# Allegro board PerfecTea_rev_2-Template.brd
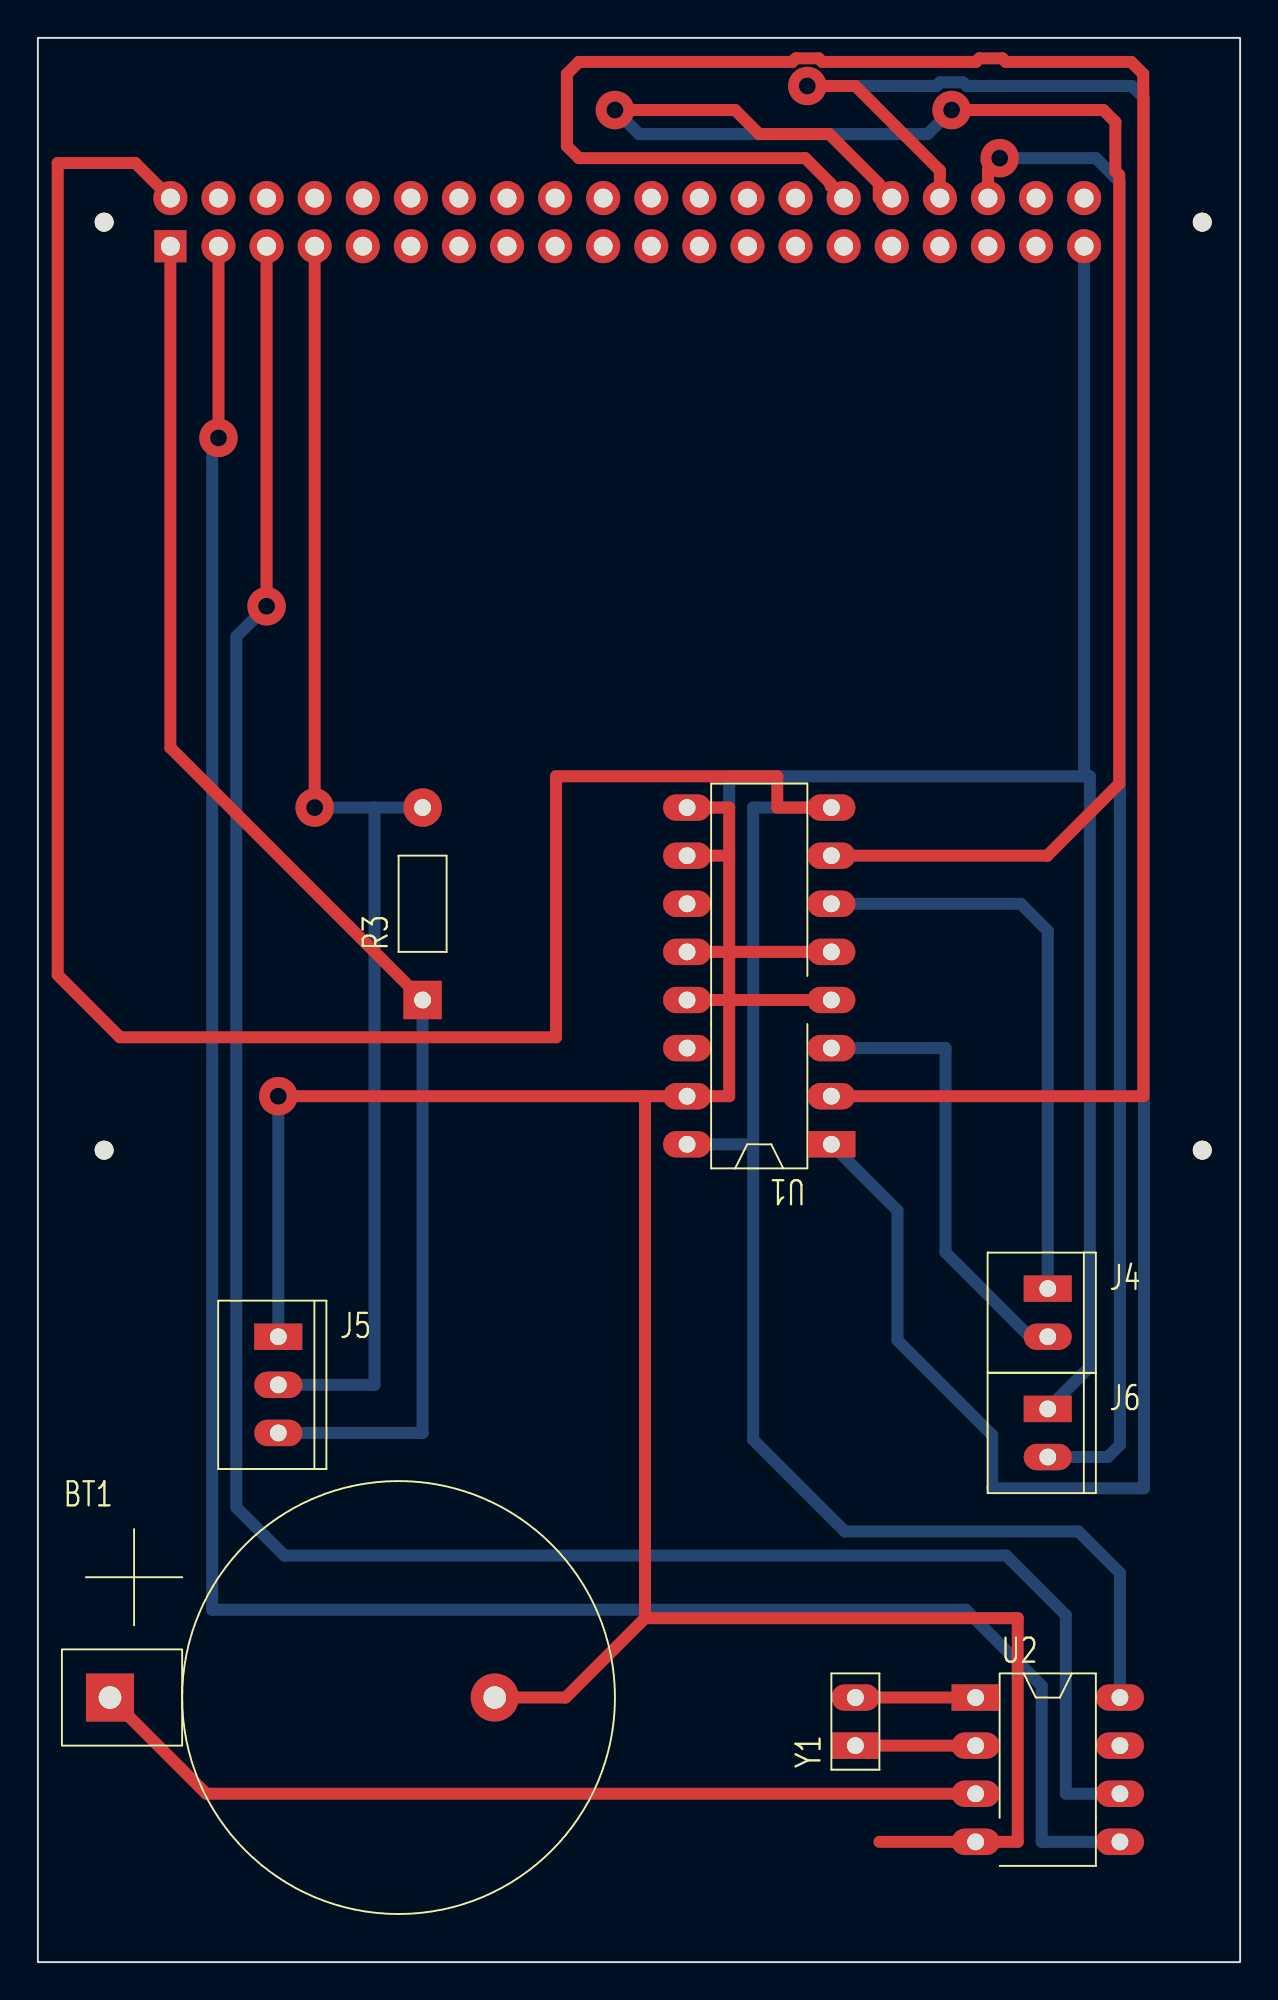
[diagram p0: board, top side]
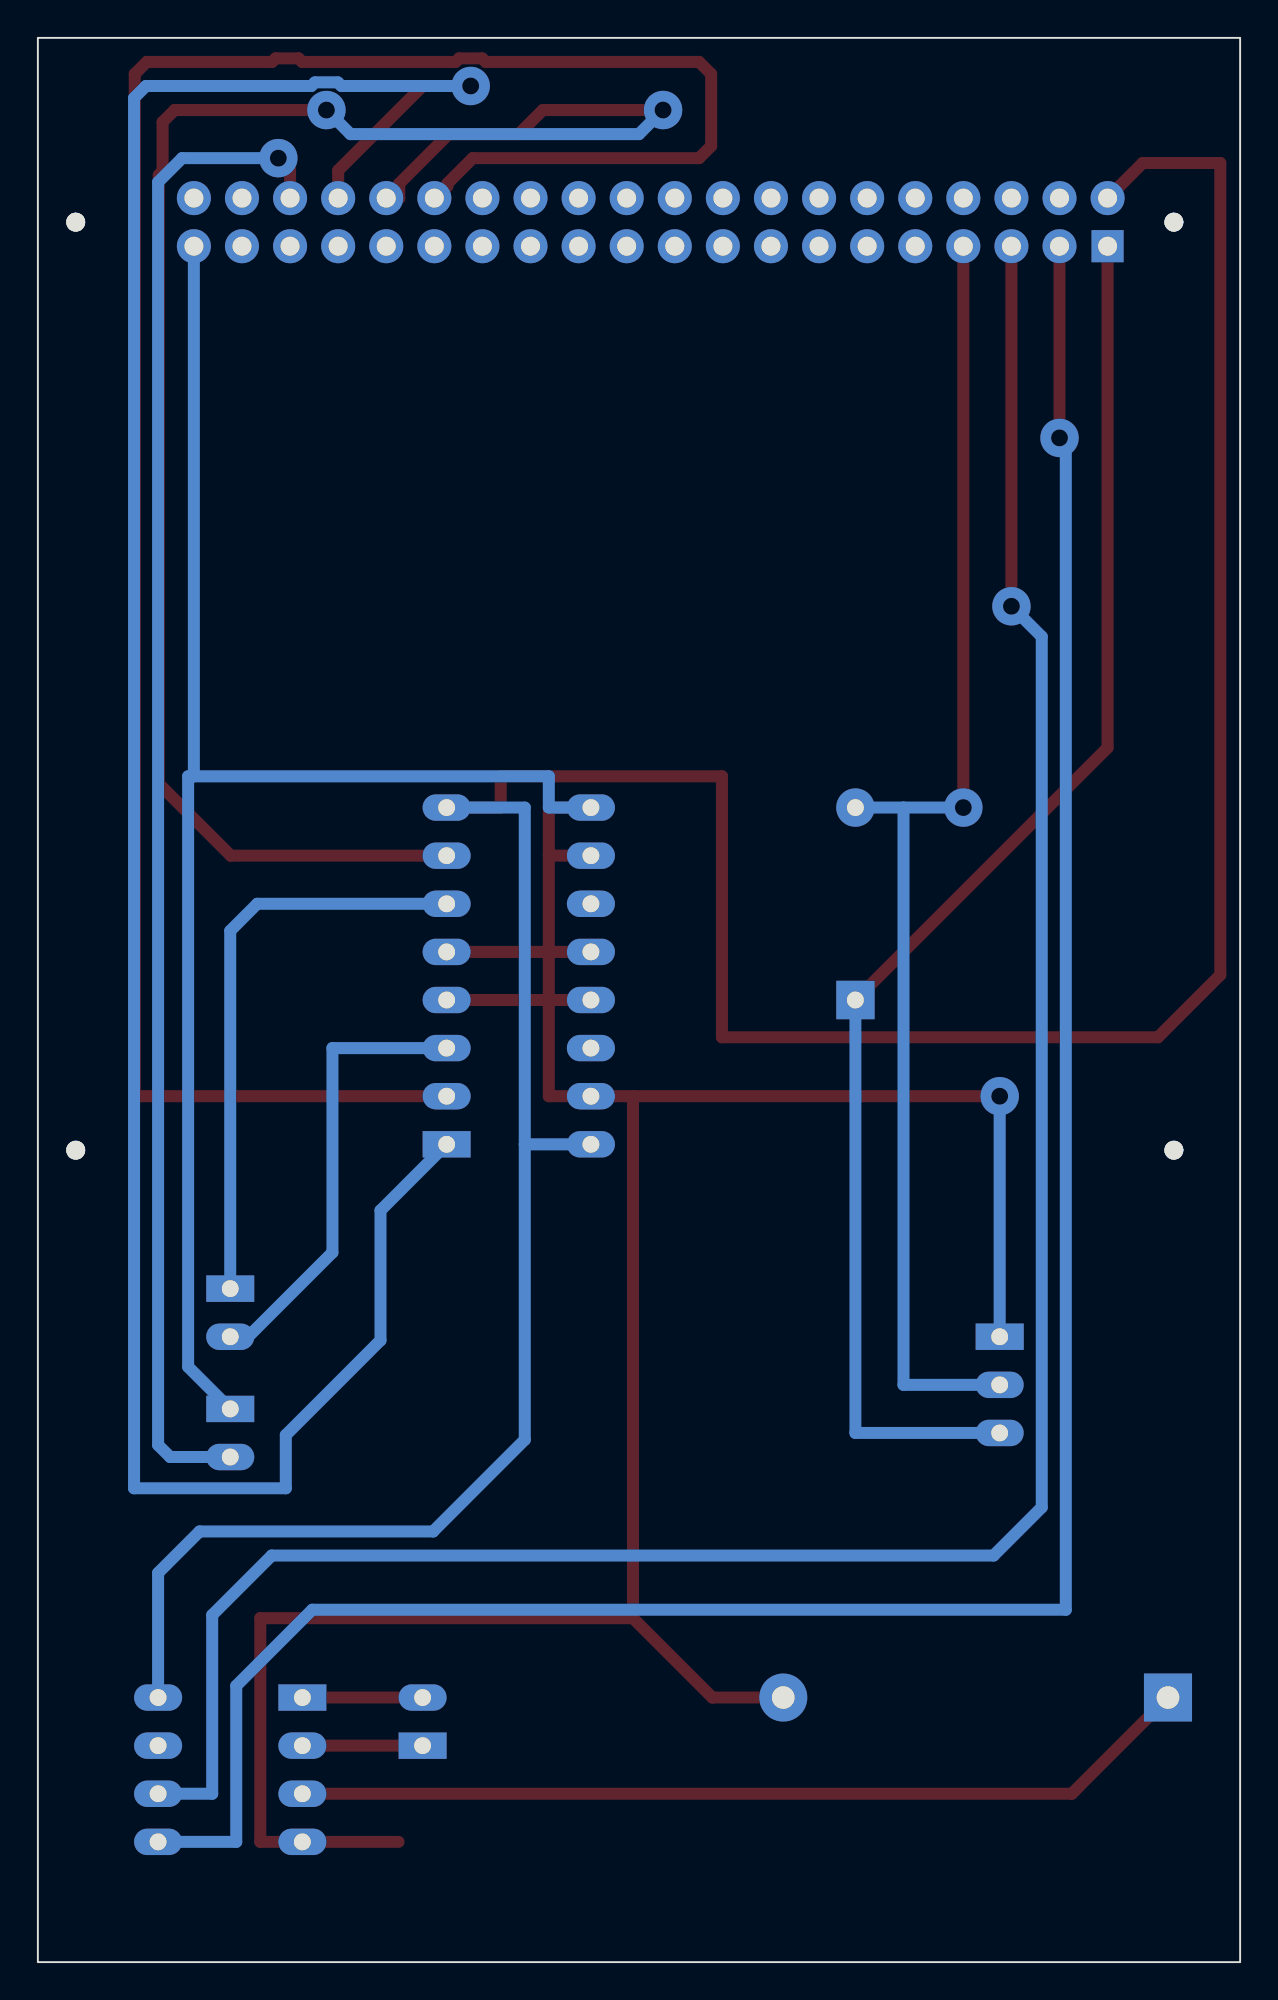
[diagram p1: board, bottom side, seen from below]

Outline 63.5 x 101.6 mm; copper layers: TOP, BOTTOM. Coordinates in mm from the lower left corner of the outline.
Outline path: rectangle 0,0 63.5,101.6

## Design rules (mm)
constraint set DEFAULT: min track width 0.635

## Placement (name value [footprint] x y rotation side)
BT1  3V Coin BATTERY  [GU-CR2032-CLIP]  3.81 13.97 0 top
J1  Rasberry Pi Header  [GU-RASP-PI-3]  0 39.37 0 top
J4  Motor Out A  [GU-MOLEX2]  53.34 35.56 0 top
J5  Temp Probe  [GU-MOLEX3]  12.7 33.02 0 top
J6  Buzzer/Loudspeaker  [GU-MOLEX2]  53.34 29.21 0 top
R3  1W Interface PULL UP  [GU-RC400]  20.32 50.8 90 top
U1  L293D  [GU-DIP16]  41.91 43.18 180 top
U2  DS1307  [GU-DIP8]  49.53 13.97 0 top
Y1  CRYSTAL  [GU-RC100]  43.18 11.43 90 top

## Library data of the parts
BT1 = BATTERY
J1 = HEADER 20X2
J4 J6 = HEADER 2
J5 = HEADER 3
R3 = RESISTOR
U1 = L293D_0
U2 = DS1307_0
Y1 = CRYSTAL

## Footprints (pads in the part's own frame, mm; a bottom-side part is the same pattern mirrored in y, then rotated)
GU-CR2032-CLIP
  rect 2.54x2.54 hole 1.194: 1(0,0)
  round 2.54 hole 1.194: 2(20.32,0)
GU-DIP8
  rect 2.54x1.397 hole 0.889: 1(0,0)
  oval 2.54x1.397 hole 0.889: 2(0,-2.54) 3(0,-5.08) 4(0,-7.62) 5(7.62,-7.62) 6(7.62,-5.08) 7(7.62,-2.54) 8(7.62,0)
GU-DIP16
  rect 2.54x1.397 hole 0.889: 1(0,0)
  oval 2.54x1.397 hole 0.889: 2(0,-2.54) 3(0,-5.08) 4(0,-7.62) 5(0,-10.16) 6(0,-12.7) 7(0,-15.24) 8(0,-17.78) 9(7.62,-17.78) 10(7.62,-15.24) 11(7.62,-12.7) 12(7.62,-10.16) 13(7.62,-7.62) 14(7.62,-5.08) 15(7.62,-2.54) 16(7.62,0)
GU-MOLEX2
  rect 2.54x1.397 hole 0.889: 1(0,0)
  oval 2.54x1.397 hole 0.889: 2(0,-2.54)
GU-MOLEX3
  rect 2.54x1.397 hole 0.889: 1(0,0)
  oval 2.54x1.397 hole 0.889: 2(0,-2.54) 3(0,-5.08)
GU-RASP-PI-3
  round 1 hole 3 unplated: (3.5,52.5) (3.5,3.5) (61.5,52.5) (61.5,3.5)
  rect 1.7x1.7 hole 1: 1(7,51.23)
  round 1.8 hole 1: 2(7,53.77) 3(9.54,51.23) 4(9.54,53.77) 5(12.08,51.23) 6(12.08,53.77) 7(14.62,51.23) 8(14.62,53.77) 9(17.16,51.23) 10(17.16,53.77) 11(19.7,51.23) 12(19.7,53.77) 13(22.24,51.23) 14(22.24,53.77) 15(24.78,51.23) 16(24.78,53.77) 17(27.32,51.23) 18(27.32,53.77) 19(29.86,51.23) 20(29.86,53.77) 21(32.4,51.23) 22(32.4,53.77) 23(34.94,51.23) 24(34.94,53.77) 25(37.48,51.23) 26(37.48,53.77) 27(40.02,51.23) 28(40.02,53.77) 29(42.56,51.23) 30(42.56,53.77) 31(45.1,51.23) 32(45.1,53.77) 33(47.64,51.23) 34(47.64,53.77) 35(50.18,51.23) 36(50.18,53.77) 37(52.72,51.23) 38(52.72,53.77) 39(55.26,51.23) 40(55.26,53.77)
GU-RC100
  rect 1.397x2.54 hole 0.889: 1(0,0)
  oval 1.397x2.54 hole 0.889: 2(2.54,0)
GU-RC400
  rect 2.032x2.032 hole 0.889: 1(0,0)
  round 2.032 hole 0.889: 2(10.16,0)

## Nets
3V3: J1.1 J5.3 R3.1
5V: J1.2 U1.8 U1.16(VSS) U2.8
GND: BT1.2(-) J1.39 J5.1 J6.1 U1.4 U1.5 U1.9 U1.10 U1.12 U1.13 U1.15 U2.4
N00214: U2.1 Y1.2
N00218: U2.2(X2) Y1.1
N00685: J1.3 U2.5
N00705: J1.5 U2.6
N00847: J1.4
N00922: J1.17
N00985: J1.6
N00997: J1.9
N01009: J1.14
N01021: J1.20
N01033: J1.25
N01045: J1.11
N01057: J1.18
N01454: J1.19
N01466: J1.21
N01478: J1.22
N01490: J1.23
N01502: J1.24
N01514: J1.26
N02097: BT1.1 U2.3
N02773: J1.7 J5.2 R3.2
N02866: J4.2 U1.3
N02870: J4.1 U1.6
N02886: J1.30 U1.2
N02898: J1.32 U1.7
N02910: J1.34 U1.1
N03226: J1.36 J6.2

Pads without a net: J1 8 10 12 13 15 16 27 28 29 31 33 35 37 38 40; U1 11 14; U2 7

## Via types
v1: diameter 2.032, hole 0.889, TOP to BOTTOM, 8 vias

## Routing (per net, layer and track width the routed paths; a pad name or vN(x,y) marks a point on that pad's centre or on a via; arc(x,y) is an arc through that point)
3V3: length 75.8
  TOP w0.635: R3.1 7,64.12 J1.1
  BOTTOM w0.635: J5.3 20.32,27.94 R3.1
5V: length 177.1
  TOP w0.635: J1.2 5.15,94.99 1.05,94.99 1.05,52.12 4.34,48.83 27.37,48.83 27.37,62.61 39.05,62.61 39.05,60.96 U1.8
  BOTTOM w0.635: 37.78,43.18 37.78,60.96 U1.8 ; 37.78,43.18 U1.16 ; 37.78,43.18 37.78,27.58 42.62,22.74 54.96,22.74 57.15,20.55 U2.8
GND: length 232.7
  TOP w0.635: 36.51,50.8 36.51,53.34 ; 36.51,50.8 U1.13 ; 36.51,50.8 36.51,45.72 U1.15 32.07,45.72 ; 36.51,50.8 U1.4 ; 36.51,53.34 U1.12 ; 36.51,53.34 U1.5 ; 36.51,53.34 36.51,58.42 ; 32.07,45.72 v1(12.7,45.72) ; 32.07,45.72 32.07,18.16 ; 44.45,6.35 U2.4 51.75,6.35 51.75,18.16 32.07,18.16 ; 36.51,58.42 U1.10 ; 36.51,58.42 36.51,60.96 U1.9 ; 32.07,18.16 27.88,13.97 BT1.2
  BOTTOM w0.635: 55.26,62.61 55.56,62.61 55.56,31.43 J6.1 ; 55.26,62.61 36.51,62.61 36.51,60.96 U1.9 ; 55.26,62.61 J1.39 ; J5.1 v1(12.7,45.72)
N00214: length 6.4
  TOP w0.635: U2.1 Y1.2
N00218: length 6.4
  TOP w0.635: U2.2 Y1.1
N00685: length 130.2
  TOP w0.635: J1.3 v1(9.54,80.48)
  BOTTOM w0.635: v1(9.54,80.48) 9.21,80.48 9.21,18.61 49.01,18.61 53.02,14.59 53.02,6.35 U2.5
N00705: length 125.7
  TOP w0.635: v1(12.08,71.59) J1.5
  BOTTOM w0.635: v1(12.08,71.59) 10.48,69.99 10.48,24.01 13.02,21.47 51.15,21.47 54.29,18.32 54.29,8.89 U2.6
N02097: length 47.8
  TOP w0.635: U2.3 8.89,8.89 BT1.1
N02773: length 70.9
  TOP w0.635: J1.7 v1(14.62,60.96)
  BOTTOM w0.635: J5.2 17.78,30.48 17.78,60.96 ; v1(14.62,60.96) 17.78,60.96 ; 17.78,60.96 R3.2
N02866: length 24.1
  BOTTOM w0.635: U1.3 47.94,48.26 47.94,37.47 52.39,33.02 J4.2
N02870: length 30.9
  BOTTOM w0.635: J4.1 53.34,54.45 51.91,55.88 U1.6
N02886: length 121.4
  TOP w0.635: U1.2 58.38,45.72 58.38,99.69 57.75,100.33 51.13,100.33 50.94,100.52 49.73,100.52 49.54,100.33 41.44,100.33 41.25,100.52 40.03,100.52 39.84,100.33 28.57,100.33 27.94,99.69 27.94,95.88 28.57,95.25 40.53,95.25 41.87,93.91 41.87,93.78 42.51,93.14 J1.30
N02898: length 96.5
  TOP w0.635: v1(48.26,97.79) 56.28,97.79 56.91,97.16 56.91,94.56 57.11,94.36 57.11,62.22 53.31,58.42 U1.7 ; J1.32 44.41,93.14 44.41,93.91 41.8,96.52 38.1,96.52 36.83,97.79 v1(30.48,97.79)
  BOTTOM w0.635: v1(48.26,97.79) 46.99,96.52 31.75,96.52 v1(30.48,97.79)
N02910: length 131.6
  TOP w0.635: v1(40.64,99.06) 43.18,99.06 47.64,94.6 J1.34
  BOTTOM w0.635: U1.1 45.4,39.69 45.4,32.83 50.4,27.83 50.4,25.02 58.42,25.02 58.42,98.42 57.78,99.06 49.06,99.06 48.87,99.25 47.65,99.25 47.46,99.06 v1(40.64,99.06)
N03226: length 80
  TOP w0.635: J1.36 50.18,94.63 v1(50.8,95.25)
  BOTTOM w0.635: J6.2 56.52,26.67 57.15,27.3 57.15,93.98 55.88,95.25 v1(50.8,95.25)
